# Altium PCB 模型主控V31.PcbDoc (part 2 of 2)
Units mil, origin at the board's own origin, x right, y up, seen from the top; angles counter-clockwise.
Board outline 1613.6 x 1060.03 mil, 4 copper layers (Top Layer, Mid-Layer 1, Mid-Layer 2, Bottom Layer); 72 components, 81 nets, 272 pads, 75 vias.
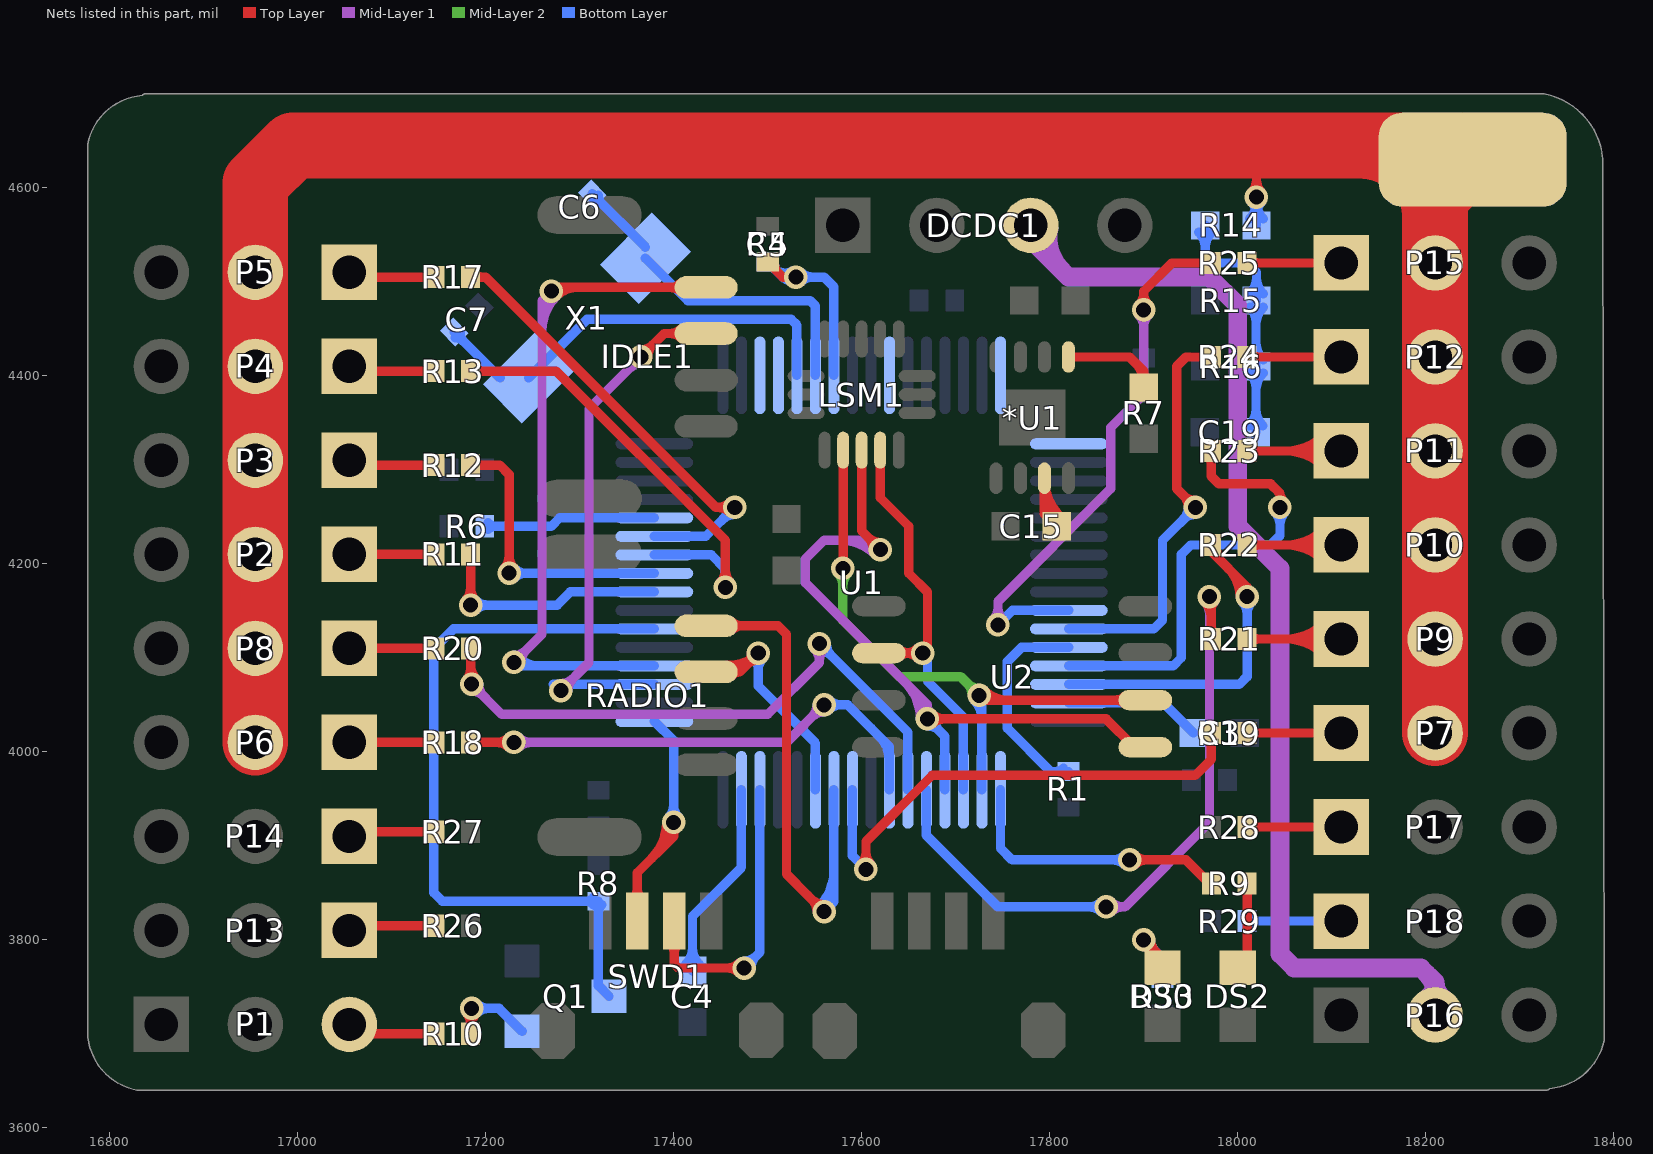
[diagram p4: the nets of this part, all layers, seen from the top]

## Via types
v1: diameter 25, hole 16, Top Layer to Bottom Layer, 75 vias

## Nets (pads, with @x,y where several pads share a name; then routed paths per layer and width w, separated by ;. In a path a pad name is that pad's centre, name@x,y a point inside that pad or via, vN(x,y) a via of type N, cw(c..) or ccw(c..) an arc to the next point about the centre after c; other vN are vias at no path point) (continued)
LED_R: R9.1 U1.33 | length 358.9
  Top Layer w10: v1(17885,3885) 17945,3885 17970,3860 R9.1@17972,3860 ; v1@17890.3,3879.7 cw(c17903.11,3866.89) 17903.11,3885 cw(c17903.11,3903.11) v1@17890.3,3890.3
  Bottom Layer w10: U1.33@17747.64,3959.53 17747.64,3897.36 17760,3885 v1(17885,3885) ; v1@17879.7,3879.7 ccw(c17866.89,3866.89) 17866.89,3885 ccw(c17866.89,3903.11) v1@17879.7,3890.3
Net*U1_1: *U1.1 R7.2 | length 154.2
  Top Layer w10: *U1.1@17820,4420 17885,4420 17900.06,4404.94 ; 17890.84,4414.16 cw(c17868.01,4391.34) R7.2@17900.06,4387.5 17900.06,4404.94 ; R7.2@17895.01,4396.13 ccw(c17889.86,4404.94) 17900.06,4404.94 ; R7.2@17905.11,4396.13 cw(c17910.26,4404.94) 17900.06,4404.94
Net*U1_7: *U1.7 C15.2 | length 138.5
  Top Layer w10: 17794.41,4268.89 ccw(c17832.96,4268.89) C15.2@17807.5,4239.94 17794.41,4253.03 *U1.7@17794.41,4291 ccw(c17852.41,4291) C15.2@17814.1,4247.44
NetC3_1: C3.1 U1.31 | length 145.8
  Bottom Layer w10: U1.31@17820.47,4052.05 17920.95,4052.05 C3.1@17953,4020
NetC4_1: C4.1 U1.47 | length 314.5
  Bottom Layer w10: C4.1@17412.93,3774.07 ccw(c17395.86,3791.14) 17420,3791.14 ccw(c17444.14,3791.14) C4.1@17427.07,3774.07 ; C4.1@17420,3767 17420,3825 17472.05,3877.05 U1.47@17472.05,3959.53 17472.05,3897.05
NetC5_2: C5.2 R4.1 U1.7 | length 303.6
  Top Layer w10: R4.1@17500,4521 17516,4505 v1(17530,4505) ; R4.1@17506.81,4521 ccw(c17523.25,4521) 17511.63,4509.37
  Bottom Layer w10: C5.2@17500,4521 17516,4505 v1(17530,4505) 17560,4505 17570.47,4494.53 U1.7@17570.47,4400.47 ; C5.2@17506.81,4521 ccw(c17523.25,4521) 17511.63,4509.37 ; C5.2@17507,4514 ccw(c17518.25,4525.25) v1@17526.24,4511.49 ; 17516.2,4504.8 ccw(c17525,4513.61) v1@17531.25,4502.84 ; v1@17535.3,4499.7 cw(c17548.11,4486.89) 17548.11,4505 cw(c17548.11,4523.11) v1@17535.3,4510.3
NetC6_2: C6.2 U1.6 X1.1 | length 374.5
  Bottom Layer w10: C6.2@17313.44,4593.44 X1.1@17370,4536.87 ; C6.2@17314.72,4587.15 cw(c17314.72,4575.08) 17323.25,4583.62 cw(c17331.79,4592.15) C6.2@17319.72,4592.15 ; X1.1@17370,4525 17415,4480 17545,4480 17550.79,4474.21 U1.6@17550.79,4400.47
NetC7_2: C7.2 U1.5 X1.2 | length 455.3
  Bottom Layer w10: C7.2@17166.56,4446.56 X1.2@17215.41,4397.72 ; C7.2@17167.85,4440.28 cw(c17167.85,4428.21) 17176.38,4436.75 cw(c17184.92,4445.28) C7.2@17172.85,4445.28 ; X1.2@17245.55,4397.72 17307.83,4460 17525,4460 17531.1,4453.9 U1.5@17531.1,4400.47
NetC19_1: C19.1 R14.1 R15.2 R16.2 | length 493.7
  Bottom Layer w10: R14.1@17958.43,4552.86 cw(c17941.36,4535.79) 17965.5,4535.79 cw(c17989.64,4535.79) R14.1@17972.57,4552.86 ; R14.1@17965.5,4559.94 17965.5,4524.5 17970,4520 18000,4520 18010,4520 18020,4510 R15.2@18020,4480 18019.5,4479.5 C19.1@18019.5,4339.94 ; C19.1@18012.43,4347.01 ccw(c17995.36,4364.08) 18019.5,4364.08 ccw(c18043.64,4364.08) C19.1@18026.57,4347.01 ; R16.2@18012.93,4402.93 cw(c17997.06,4387.06) 18019.5,4387.06 ; R16.2@18012.93,4417.07 ccw(c17997.06,4432.94) 18019.5,4432.94 ; R15.2@18012.93,4472.93 cw(c17997.06,4457.06) 18019.5,4457.06 ; R15.2@18012.93,4487.07 ccw(c17995.86,4504.14) 18020,4504.14 ccw(c18044.14,4504.14) R15.2@18027.07,4487.07 ; 18019.5,4384.65 cw(c18045.35,4384.65) R16.2@18027.07,4402.93 ; 18019.5,4435.35 ccw(c18045.35,4435.35) R16.2@18027.07,4417.07 ; 18019.5,4454.65 cw(c18045.35,4454.65) R15.2@18027.07,4472.93
NetDS2_1: DS2.1 R9.2 | length 112.8
  Top Layer w10: DS2.1@18000,3770.32 18010,3780.32 R9.2@18010,3860 ; R9.2@18006.46,3854.65 cw(c17997.93,3846.12) 18010,3846.12 cw(c18022.07,3846.12) R9.2@18013.54,3854.65
NetDS3_1: DS3.1 R30.2 | length 185.3
  Top Layer w10: v1@17900,3792.5 cw(c17900,3774.39) 17912.8,3787.2 cw(c17925.61,3800) v1@17907.5,3800 ; v1(17900,3800) 17920,3780 DS3.1@17920,3770.32 ; 17908.9,3791.1 cw(c17891.85,3774.05) DS3.1@17915.74,3770.77
  Bottom Layer w10: v1@17900,3792.5 cw(c17900,3774.39) 17912.8,3787.2 cw(c17925.61,3800) v1@17907.5,3800 ; v1(17900,3800) 17920,3780 R30.2@17920,3759 ; R30.2@17916.46,3762.54 ccw(c17907.93,3771.07) 17920,3771.07 ccw(c17932.07,3771.07) R30.2@17923.54,3762.54
NetP1_3: P1.3 R10.2 | length 100
  Top Layer w10: P1.3@17065,3700 R10.2@17146,3700 ; R10.2@17142.46,3696.46 ccw(c17133.93,3687.93) 17133.93,3700 ccw(c17133.93,3712.07) R10.2@17142.46,3703.54
NetP2_1: P2.1 R11.2 | length 110
  Top Layer w10: P2.1@17055,4210 R11.2@17146,4210 ; R11.2@17142.46,4206.46 ccw(c17133.93,4197.93) 17133.93,4210 ccw(c17133.93,4222.07) R11.2@17142.46,4213.54
NetP3_1: P3.1 R12.2 | length 105
  Top Layer w10: P3.1@17060,4305 R12.2@17146,4305 ; R12.2@17142.46,4301.46 ccw(c17133.93,4292.93) 17133.93,4305 ccw(c17133.93,4317.07) R12.2@17142.46,4308.54
NetP4_1: P4.1 R13.2 | length 112
  Top Layer w10: P4.1@17055,4410 17060,4405 R13.2@17146,4405 ; R13.2@17142.46,4401.46 ccw(c17133.93,4392.93) 17133.93,4405 ccw(c17133.93,4417.07) R13.2@17142.46,4408.54
NetP5_1: P5.1 R17.2 | length 112
  Top Layer w10: P5.1@17055,4510 17060,4505 R17.2@17146,4505 ; R17.2@17142.46,4501.46 ccw(c17133.93,4492.93) 17133.93,4505 ccw(c17133.93,4517.07) R17.2@17142.46,4508.54
NetP6_1: P6.1 R18.2 | length 110
  Top Layer w10: P6.1@17055,4010 R18.2@17146,4010 ; R18.2@17142.46,4006.46 ccw(c17133.93,3997.93) 17133.93,4010 ccw(c17133.93,4022.07) R18.2@17142.46,4013.54
NetP7_1: P7.1 R19.2 | length 119
  Top Layer w10: R19.2@18010,4020 P7.1@18110,4020 ; R19.2@18013.54,4016.46 cw(c18022.07,4007.93) 18022.07,4020 cw(c18022.07,4032.07) R19.2@18013.54,4023.54
NetP8_1: P8.1 R20.2 | length 110
  Top Layer w10: P8.1@17055,4110 R20.2@17146,4110 ; R20.2@17142.46,4106.46 ccw(c17133.93,4097.93) 17133.93,4110 ccw(c17133.93,4122.07) R20.2@17142.46,4113.54
NetP9_1: P9.1 R21.2 | length 267.1
  Top Layer w10: R21.2@18010,4120 P9.1@18110,4120 ; R21.2@18013.54,4116.46 cw(c18022.07,4107.93) 18022.07,4120 cw(c18022.07,4132.07) R21.2@18013.54,4123.54 ; P9.1@18092.66,4102.66 ccw(c18050.79,4060.79) 18050.79,4120 ccw(c18050.79,4179.21) P9.1@18092.66,4137.34 ; P9.1@18099.73,4109.73 ccw(c18074.93,4084.93) 18074.93,4120 ccw(c18074.93,4155.07) P9.1@18099.73,4130.27
NetP10_1: P10.1 R22.2 | length 267.1
  Top Layer w10: R22.2@18010,4220 P10.1@18110,4220 ; R22.2@18013.54,4216.46 cw(c18022.07,4207.93) 18022.07,4220 cw(c18022.07,4232.07) R22.2@18013.54,4223.54 ; P10.1@18092.66,4202.66 ccw(c18050.79,4160.79) 18050.79,4220 ccw(c18050.79,4279.21) P10.1@18092.66,4237.34 ; P10.1@18099.73,4209.73 ccw(c18074.93,4184.93) 18074.93,4220 ccw(c18074.93,4255.07) P10.1@18099.73,4230.27
NetP11_1: P11.1 R23.2 | length 267.1
  Top Layer w10: R23.2@18010,4320 P11.1@18110,4320 ; R23.2@18013.54,4316.46 cw(c18022.07,4307.93) 18022.07,4320 cw(c18022.07,4332.07) R23.2@18013.54,4323.54 ; P11.1@18092.66,4302.66 ccw(c18050.79,4260.79) 18050.79,4320 ccw(c18050.79,4379.21) P11.1@18092.66,4337.34 ; P11.1@18099.73,4309.73 ccw(c18074.93,4284.93) 18074.93,4320 ccw(c18074.93,4355.07) P11.1@18099.73,4330.27
NetP12_1: P12.1 R24.2 | length 119
  Top Layer w10: R24.2@18010,4420 P12.1@18110,4420 ; R24.2@18013.54,4416.46 cw(c18022.07,4407.93) 18022.07,4420 cw(c18022.07,4432.07) R24.2@18013.54,4423.54
NetP13_1: P13.1 R26.1 | length 105
  Top Layer w10: P13.1@17060,3815 R26.1@17146,3815 ; R26.1@17142.46,3811.46 ccw(c17133.93,3802.93) 17133.93,3815 ccw(c17133.93,3827.07) R26.1@17142.46,3818.54
NetP14_1: P14.1 R27.1 | length 105
  Top Layer w10: P14.1@17060,3915 R27.1@17146,3915 ; R27.1@17142.46,3911.46 ccw(c17133.93,3902.93) 17133.93,3915 ccw(c17133.93,3927.07) R27.1@17142.46,3918.54
NetP15_1: P15.1 R25.2 | length 119
  Top Layer w10: R25.2@18010,4520 P15.1@18110,4520 ; R25.2@18013.54,4516.46 cw(c18022.07,4507.93) 18022.07,4520 cw(c18022.07,4532.07) R25.2@18013.54,4523.54
NetP17_1: P17.1 R28.1 | length 119
  Top Layer w10: R28.1@18010,3920 P17.1@18110,3920 ; R28.1@18013.54,3916.46 cw(c18022.07,3907.93) 18022.07,3920 cw(c18022.07,3932.07) R28.1@18013.54,3923.54
NetP18_1: P18.1 R29.1 | length 119
  Bottom Layer w10: R29.1@18010,3820 P18.1@18110,3820 ; R29.1@18013.54,3816.46 cw(c18022.07,3807.93) 18022.07,3820 cw(c18022.07,3832.07) R29.1@18013.54,3823.54
NetQ1_2: Q1.2 R10.1 | length 165.7
  Top Layer w10: v1@17179.7,3721.7 cw(c17169.31,3711.31) R10.1@17184,3711.31 ; R10.1@17180.46,3705.35 ccw(c17171.93,3713.88) 17184,3713.88 ccw(c17196.07,3713.88) R10.1@17187.54,3705.35 ; R10.1@17184,3700 v1@17184,3726 ; R10.1@17184,3706.48 cw(c17205.52,3706.48) v1@17190.3,3721.7
  Bottom Layer w10: v1(17185,3727) 17214.34,3727 Q1.2@17238.74,3702.6 ; v1@17190.3,3721.7 cw(c17203.11,3708.89) 17203.11,3727 cw(c17203.11,3745.11) v1@17190.3,3732.3
NetR1_2: R1.2 U1.28 | length 245.8
  Bottom Layer w10: R1.2@17814.65,3975.46 ccw(c17806.12,3966.93) 17806.12,3979 ccw(c17806.12,3991.07) R1.2@17814.65,3982.54 ; R1.2@17820,3979 17801,3979 17755,4025 17755,4095 17755,4096.1 17770,4111.1 U1.28@17820.47,4111.1
NetR6_2: R6.2 U1.60 | length 203.2
  Bottom Layer w10: R6.2@17199,4240 17270,4240 17278.9,4248.9 U1.60@17379.53,4248.9 ; R6.2@17202.54,4236.46 cw(c17211.07,4227.93) 17211.07,4240 cw(c17211.07,4252.07) R6.2@17202.54,4243.54
NRF_CE: U1.10
POWER: DCDC1.3 P16.2 | length 1325.4
  Mid-Layer 1 w20: DCDC1.3@17780,4560 17780,4545 17820,4505 17970,4505 18000,4475 18000,4240 18045,4195 18045,3785 18060,3770 18195,3770 18210,3755 ; DCDC1.3@17799.16,4556.24 ccw(c17846.88,4546.89) 17812.5,4512.5 ; P16.2@18199.74,3736.62 ccw(c18188.4,3755) 18210,3755 ; 18200.09,3764.91 cw(c18169.28,3734.11) P16.2@18210.45,3719.85 ; P16.2@18210,3720 18210,3755 ; P16.2@18220.26,3736.62 cw(c18231.6,3755) 18210,3755
PWM1: R11.1 U1.56 | length 331.2
  Top Layer w10: v1@17178.7,4161.3 ccw(c17165.89,4174.11) 17184,4174.11 ccw(c17202.11,4174.11) v1@17189.3,4161.3 ; R11.1@17180.46,4204.65 cw(c17171.93,4196.12) 17184,4196.12 cw(c17196.07,4196.12) R11.1@17187.54,4204.65 ; v1(17184,4156) R11.1@17184,4210
  Bottom Layer w10: v1(17184,4156) 17276,4156 17290.16,4170.16 U1.56@17379.53,4170.16 ; v1@17189.3,4150.7 cw(c17202.11,4137.89) 17202.11,4156 cw(c17202.11,4174.11) v1@17189.3,4161.3
PWM2: R12.1 U1.57 | length 380.6
  Top Layer w10: R12.1@17184,4305 17215,4305 17225,4295 v1(17225,4190) ; R12.1@17187.54,4301.46 cw(c17196.07,4292.93) 17196.07,4305 cw(c17196.07,4317.07) R12.1@17187.54,4308.54 ; v1@17219.7,4195.3 ccw(c17206.89,4208.11) 17225,4208.11 ccw(c17243.11,4208.11) v1@17230.3,4195.3
  Bottom Layer w10: v1(17225,4190) 17379.37,4190 U1.57@17379.53,4189.84 ; v1@17230.3,4184.7 cw(c17243.11,4171.89) 17243.11,4190 cw(c17243.11,4208.11) v1@17230.3,4195.3
PWM3: R25.1 U1.26 | length 689.8
  Top Layer w10: v1@17894.7,4475.3 ccw(c17881.89,4488.11) 17900,4488.11 ccw(c17918.11,4488.11) v1@17905.3,4475.3 ; v1(17900,4470) 17900,4490 17930,4520 R25.1@17972,4520 ; R25.1@17968.46,4516.46 ccw(c17959.93,4507.93) 17959.93,4520 ccw(c17959.93,4532.07) R25.1@17968.46,4523.54
  Mid-Layer 1 w10: v1@17739.7,4140.3 ccw(c17726.89,4153.11) 17745,4153.11 ccw(c17763.11,4153.11) v1@17750.3,4140.3 ; v1(17745,4135) 17745,4160 17865,4280 17865,4345 17900,4380 v1(17900,4470) ; v1@17894.7,4464.7 cw(c17881.89,4451.89) 17900,4451.89 cw(c17918.11,4451.89) v1@17905.3,4464.7
  Bottom Layer w10: v1(17745,4135) 17760.47,4150.47 U1.26@17820.47,4150.47
PWM4: R24.1 U1.27 | length 513.1
  Top Layer w10: v1@17947.5,4260 ccw(c17929.39,4260) 17942.2,4272.8 ccw(c17955,4285.61) v1@17955,4267.5 ; v1(17955,4260) 17935,4280 17935,4410 17945,4420 R24.1@17972,4420 ; R24.1@17968.46,4416.46 ccw(c17959.93,4407.93) 17959.93,4420 ccw(c17959.93,4432.07) R24.1@17968.46,4423.54
  Bottom Layer w10: U1.27@17820.47,4130.79 17910.79,4130.79 17920,4140 17920,4225 v1(17955,4260) ; v1@17947.5,4260 cw(c17929.39,4260) 17942.2,4247.2 cw(c17955,4234.39) v1@17955,4252.5
PWM5: R13.1 U1.58 | length 544.2
  Top Layer w10: R13.1@17184,4405 17275,4405 17455,4225 v1(17455,4175) ; R13.1@17187.54,4401.46 cw(c17196.07,4392.93) 17196.07,4405 cw(c17196.07,4417.07) R13.1@17187.54,4408.54 ; v1@17449.7,4180.3 ccw(c17436.89,4193.11) 17455,4193.11 ccw(c17473.11,4193.11) v1@17460.3,4180.3
  Bottom Layer w10: U1.58@17379.53,4209.53 17440,4209.53 17454.53,4195 17454.53,4175.47 v1(17455,4175)
PWM6: R17.1 U1.59 | length 556.6
  Top Layer w10: R17.1@17184,4505 17200,4505 17445,4260 v1(17465,4260) ; R17.1@17187.54,4501.46 cw(c17196.07,4492.93) 17196.07,4505 cw(c17196.07,4517.07) R17.1@17187.54,4508.54 ; v1@17459.7,4254.7 ccw(c17446.89,4241.89) 17446.89,4260 ccw(c17446.89,4278.11) v1@17459.7,4265.3
  Bottom Layer w10: U1.59@17379.53,4229.21 17434.21,4229.21 v1(17465,4260) ; v1@17457.5,4260 cw(c17439.39,4260) 17452.2,4247.2 cw(c17465,4234.39) v1@17465,4252.5
PWM7: R23.1 U1.29 | length 567.1
  Top Layer w10: R23.1@17968.46,4314.65 cw(c17959.93,4306.12) 17972,4306.12 cw(c17984.07,4306.12) R23.1@17975.54,4314.65 ; R23.1@17972,4320 17972,4293 17980,4285 18035,4285 18045,4275 v1(18045,4260) ; 18041.31,4278.69 cw(c18025.75,4263.13) v1@18047.47,4259.6
  Bottom Layer w10: U1.29@17820.47,4091.42 17931.42,4091.42 17940,4100 17940,4210 17950,4220 18035,4220 18045,4230 v1(18045,4260) ; v1@18039.7,4254.7 cw(c18026.89,4241.89) 18045,4241.89 cw(c18063.11,4241.89) v1@18050.3,4254.7
PWM8: R22.1 U1.30 | length 443.9
  Top Layer w10: R22.1@17972,4220 17972,4213 18010,4175 v1(18010,4165) ; R22.1@17977,4218.19 ccw(c18001.6,4218.19) 17984.2,4200.8 ; 17990.13,4194.87 cw(c17960.25,4165) v1@18002.5,4165 ; 18007.2,4177.8 cw(c17994.39,4165) v1@18012.5,4165
  Bottom Layer w10: U1.30@17820.47,4071.73 18001.73,4071.73 18010,4080 18010,4115 v1(18010,4165) ; v1@18004.7,4159.7 cw(c17991.89,4146.89) 18010,4146.89 cw(c18028.11,4146.89) v1@18015.3,4159.7
PWM9: R19.1 U1.41 | length 599.7
  Top Layer w10: v1@17599.27,3880.3 ccw(c17586.47,3893.11) 17604.57,3893.11 ccw(c17622.68,3893.11) v1@17609.87,3880.3 ; v1@17605,3875.43 v1(17604.57,3875) 17604.57,3904.57 17675,3975 17955,3975 17972,3992 R19.1@17972,4020 ; R19.1@17968.46,4014.65 cw(c17959.93,4006.12) 17972,4006.12 cw(c17984.07,4006.12) R19.1@17975.54,4014.65
  Bottom Layer w10: U1.41@17590.16,3959.53 17590.16,3889.41 v1(17604.57,3875)
PWM10: R21.1 U1.37 | length 836.9
  Top Layer w10: v1@17964.7,4159.7 cw(c17947.06,4142.06) 17972,4142.06 ; R21.1@17968.46,4125.35 ccw(c17959.93,4133.88) 17972,4133.88 ccw(c17984.07,4133.88) R21.1@17975.54,4125.35 ; v1(17970,4165) 17972,4163 R21.1@17972,4120 ; 17972,4151.72 cw(c17983.28,4151.72) v1@17975.3,4159.7
  Mid-Layer 1 w10: v1(17860,3835) 17880,3835 17970,3925 v1(17970,4165) ; v1@17865.3,3829.7 cw(c17878.11,3816.89) 17878.11,3835 cw(c17878.11,3853.11) v1@17865.3,3840.3 ; v1@17964.7,4159.7 cw(c17951.89,4146.89) 17970,4146.89 cw(c17988.11,4146.89) v1@17975.3,4159.7
  Bottom Layer w10: U1.37@17668.9,3959.53 17668.9,3911.1 17745,3835 v1(17860,3835) ; v1@17854.7,3829.7 ccw(c17841.89,3816.89) 17841.89,3835 ccw(c17841.89,3853.11) v1@17854.7,3840.3
PWM11: R20.1 U1.38 | length 791.3
  Top Layer w10: v1@17179.7,4077.3 ccw(c17169.31,4087.69) 17184,4087.69 ; R20.1@17180.46,4104.65 cw(c17171.93,4096.12) 17184,4096.12 cw(c17196.07,4096.12) R20.1@17187.54,4104.65 ; v1@17184,4072 R20.1@17184,4110 ; 17184,4092.52 ccw(c17205.52,4092.52) v1@17190.3,4077.3
  Mid-Layer 1 w10: v1@17185,4064.5 cw(c17185,4046.39) 17197.8,4059.2 cw(c17210.61,4072) v1@17192.5,4072 ; v1(17185,4072) 17217,4040 17235,4040 17500,4040 17555,4095 v1(17555,4115) ; v1@17549.7,4109.7 cw(c17536.89,4096.89) 17555,4096.89 cw(c17573.11,4096.89) v1@17560.3,4109.7
  Bottom Layer w10: v1@17555,4107.5 cw(c17555,4089.39) 17567.8,4102.2 cw(c17580.61,4115) v1@17562.5,4115 ; v1(17555,4115) 17649.21,4020.79 U1.38@17649.21,3959.53
PWM12: R18.1 U1.39 | length 680.9
  Top Layer w10: R18.1@17184,4010 v1(17230,4010) ; R18.1@17187.54,4006.46 cw(c17196.07,3997.93) 17196.07,4010 cw(c17196.07,4022.07) R18.1@17187.54,4013.54 ; v1@17224.7,4004.7 ccw(c17211.89,3991.89) 17211.89,4010 ccw(c17211.89,4028.11) v1@17224.7,4015.3
  Mid-Layer 1 w10: v1(17230,4010) 17520,4010 v1(17560,4050) ; v1@17235.3,4004.7 cw(c17248.11,3991.89) 17248.11,4010 cw(c17248.11,4028.11) v1@17235.3,4015.3 ; v1@17552.5,4050 cw(c17534.39,4050) 17547.2,4037.2 cw(c17560,4024.39) v1@17560,4042.5
  Bottom Layer w10: v1(17560,4050) 17585,4050 17610,4025 17629.53,4005.47 U1.39@17629.53,3959.53 ; v1@17565.3,4044.7 cw(c17578.11,4031.89) 17578.11,4050 cw(c17578.11,4068.11) v1@17565.3,4055.3 ; 17620.55,4014.45 cw(c17601.06,3994.96) U1.39@17628.62,3994.96
SBUS: Q1.3 R8.1 U1.54 | length 825.5
  Bottom Layer w10: R8.1@17314.65,3837.46 ccw(c17306.12,3828.93) 17306.12,3841 ccw(c17306.12,3853.07) R8.1@17314.65,3844.54 ; R8.1@17316.46,3837.46 cw(c17307.93,3828.93) 17320,3828.93 cw(c17332.07,3828.93) R8.1@17323.54,3837.46 ; Q1.3@17331.26,3740 17320,3751.26 R8.1@17320,3841 17154,3841 17145,3850 17145,4110 17165.79,4130.79 U1.54@17379.53,4130.79
SCL_B: U1.3
SCLK_FC: SWD1.3 U1.49 | length 337.5
  Top Layer w10: SWD1.3@17356.44,3843.52 ccw(c17344.82,3855.14) 17361.26,3855.14 ccw(c17377.7,3855.14) SWD1.3@17366.08,3843.52 ; SWD1.3@17361.26,3840 17361.26,3871.26 17400,3910 v1(17400,3925) ; 17376.59,3886.59 ccw(c17338.18,3925) v1@17392.5,3925 ; 17393.66,3903.66 ccw(c17372.32,3925) v1@17402.5,3925
  Bottom Layer w10: U1.49@17379.53,4032.36 17400,4011.89 v1(17400,3925) ; v1@17394.7,3930.3 ccw(c17381.89,3943.11) 17400,3943.11 ccw(c17418.11,3943.11) v1@17405.3,3930.3
SDA_B: U1.4
SPI2_CK: LSM1.2 U1.34 U2.6 | length 763.8
  Top Layer w10: v1@17580.31,4195.31 LSM1.2@17580.31,4320.94 ; v1(17725,4060) 17730,4055 U2.6@17901.73,4055 ; v1@17730.3,4065.3 ccw(c17755.18,4090.18) 17755.18,4055 ; U2.6@17879.9,4050.88 ccw(c17869.95,4040.93) 17869.95,4055 ccw(c17869.95,4069.07) U2.6@17879.9,4059.12
  Mid-Layer 2 w10: v1@17574.7,4189.7 cw(c17561.89,4176.89) 17580,4176.89 cw(c17598.11,4176.89) v1@17585.3,4189.7 ; v1(17580,4195) 17580,4140 17640,4080 17705,4080 v1(17725,4060) ; v1@17717.5,4060 ccw(c17699.39,4060) 17712.2,4072.8 ccw(c17725,4085.61) v1@17725,4067.5
  Bottom Layer w10: v1@17719.7,4054.7 cw(c17699.76,4034.76) 17727.95,4034.76 ; U1.34@17727.95,3959.53 v1@17727.95,4057.05
SPI2_SI: LSM1.3 U1.36 U2.5 | length 972.6
  Top Layer w10: LSM1.3@17600,4320.94 17600,4235 v1(17620,4215) ; v1@17612.5,4215 ccw(c17594.39,4215) 17607.2,4227.8 ccw(c17620,4240.61) v1@17620,4222.5 ; v1(17670,4035) 17860,4035 17890,4005 U2.5@17901.73,4005 ; v1@17675.3,4029.7 cw(c17688.11,4016.89) 17688.11,4035 cw(c17688.11,4053.11) v1@17675.3,4040.3
  Mid-Layer 1 w10: 17577.75,4225 cw(c17577.75,4172.75) v1@17614.7,4209.7 ; 17601.89,4225 cw(c17601.89,4196.89) v1@17621.77,4216.77 ; v1(17620,4215) 17610,4225 17560,4225 17540,4205 17540,4180 17670,4050 v1(17670,4035) ; 17646.59,4073.41 cw(c17608.18,4035) v1@17662.5,4035 ; 17663.66,4056.34 cw(c17642.32,4035) v1@17672.5,4035
  Bottom Layer w10: v1@17670,4027.5 cw(c17670,4009.39) 17682.8,4022.2 cw(c17695.61,4035) v1@17677.5,4035 ; v1(17670,4035) 17688.58,4016.42 U1.36@17688.58,3959.53
SPI2_SO: LSM1.4 U1.35 U2.2 | length 490.4
  Top Layer w10: U2.2@17618.27,4105 v1(17665,4105) ; LSM1.4@17619.69,4320.94 17619.69,4270.31 17650,4240 17650,4190 17670,4170 v1@17670,4105 ; U2.2@17640.1,4100.88 cw(c17650.05,4090.93) 17650.05,4105 cw(c17650.05,4119.07) U2.2@17640.1,4109.12 ; v1@17659.7,4099.7 ccw(c17646.89,4086.89) 17646.89,4105 ccw(c17646.89,4123.11) v1@17659.7,4110.3
  Bottom Layer w10: v1@17670,4100 17670,4075 17708.27,4036.73 U1.35@17708.27,3959.53
SWD_FC: SWD1.2 U1.46 | length 421
  Top Layer w10: SWD1.2@17395.81,3796.48 cw(c17384.19,3784.86) 17400.63,3784.86 cw(c17417.07,3784.86) SWD1.2@17405.45,3796.48 ; SWD1.2@17400.63,3840 17400.63,3774.37 17405,3770 v1(17475,3770) ; v1@17469.7,3764.7 ccw(c17456.89,3751.89) 17456.89,3770 ccw(c17456.89,3788.11) v1@17469.7,3775.3
  Bottom Layer w10: v1(17475,3770) 17491.73,3786.73 U1.46@17491.73,3959.53 ; v1@17475,3777.5 ccw(c17475,3795.61) 17487.8,3782.8 ccw(c17500.61,3770) v1@17482.5,3770
UART1_R_1: RADIO1.3 U1.43 | length 367.6
  Top Layer w10: RADIO1.3@17434.57,4085 17470,4085 ; RADIO1.3@17455.93,4082 ccw(c17457.05,4105.95) 17474,4089 ; RADIO1.3@17456.39,4091.99 ccw(c17458.48,4136.52) v1(17490,4105) 17470,4085 ; RADIO1.3@17461.68,4080.82 cw(c17470,4074.63) 17470,4085 ; RADIO1.3@17461.68,4089.18 ccw(c17470,4095.37) 17470,4085 ; v1@17482.5,4105 cw(c17464.39,4105) 17477.2,4092.2 cw(c17490,4079.39) v1@17490,4097.5
  Bottom Layer w10: v1@17484.7,4099.7 cw(c17471.89,4086.89) 17490,4086.89 cw(c17508.11,4086.89) v1@17495.3,4099.7 ; v1(17490,4105) 17490,4070 17550.79,4009.21 U1.43@17550.79,3959.53
UART1_T_1: RADIO1.4 U1.42 | length 655.2
  Top Layer w10: RADIO1.4@17434.57,4134 17511,4134 17520,4125 17520,3920 17520,3870 17542.5,3847.5 v1(17560,3830) ; RADIO1.4@17461.02,4129.05 cw(c17472.97,4117.1) 17472.97,4134 cw(c17472.97,4150.9) RADIO1.4@17461.02,4138.95 ; v1@17552.5,3830 ccw(c17534.39,3830) 17547.2,3842.8 ccw(c17560,3855.61) v1@17560,3837.5
  Bottom Layer w10: v1@17554.7,3835.3 ccw(c17516.61,3873.39) 17570.47,3873.39 ; v1(17560,3830) 17570.47,3840.47 17570.47,3875 U1.42@17570.47,3959.53 ; v1@17561.77,3828.23 ccw(c17540.75,3849.25) 17570.47,3849.25
UART2_R_1: U1.17
UART2_T_1: U1.16
UART4_R_1: IDLE1.4 U1.52 | length 870.8
  Top Layer w10: v1@17274,4494 IDLE1.4@17434.57,4494 ; v1@17275.3,4484.7 cw(c17297.76,4462.24) 17297.76,4494 ; IDLE1.4@17408.12,4489.05 ccw(c17396.17,4477.1) 17396.17,4494 ccw(c17396.17,4510.9) IDLE1.4@17408.12,4498.95
  Mid-Layer 1 w10: v1(17230,4095) 17260,4125 17260,4480 ; v1@17230,4102.5 ccw(c17230,4120.61) 17242.8,4107.8 ccw(c17255.61,4095) v1@17237.5,4095 ; 17260,4447.75 cw(c17312.25,4447.75) v1@17275.3,4484.7 ; 17260,4471.89 cw(c17288.11,4471.89) v1@17268.23,4491.77
  Bottom Layer w10: v1@17233.58,4091.42 U1.52@17379.53,4091.42 ; v1@17235.3,4100.3 ccw(c17256.76,4121.76) 17256.76,4091.42
  other v1: 17270,4490
UART4_T_1: IDLE1.3 U1.51 | length 689.8
  Top Layer w10: v1(17365,4420) 17390,4445 IDLE1.3@17434.57,4445 ; v1@17365,4427.5 ccw(c17365,4445.61) 17377.8,4432.8 ccw(c17390.61,4420) v1@17372.5,4420 ; IDLE1.3@17408.12,4440.05 ccw(c17396.17,4428.1) 17396.17,4445 ccw(c17396.17,4461.9) IDLE1.3@17408.12,4449.95
  Mid-Layer 1 w10: v1(17280,4065) 17310,4095 17310,4365 v1(17365,4420) ; v1@17280,4072.5 ccw(c17280,4090.61) 17292.8,4077.8 ccw(c17305.61,4065) v1@17287.5,4065 ; v1@17357.5,4420 cw(c17339.39,4420) 17352.2,4407.2 cw(c17365,4394.39) v1@17365,4412.5
  Bottom Layer w10: v1@17271.73,4071.73 U1.51@17379.53,4071.73
VCC_DJ: P2.2 P3.2 P4.2 P5.2 P6.2 P7.2 P8.2 P9.2 P10.2 P11.2 P12.2 P15.2 pad.0@18250,4630 R14.2 | length 3386.8
  Top Layer w10: v1@18014.7,4595.3 ccw(c18001.89,4608.11) 18020,4608.11 ccw(c18038.11,4608.11) v1@18025.3,4595.3 ; v1(18020,4590) 18020,4635
  Top Layer w40: pad.0@18178.79,4608.79 cw(c18103.43,4533.43) P15.2@18210,4533.43 ; P9.2@18210,4120 P10.2@18210,4220 P11.2@18210,4320 P12.2@18210,4420 P15.2@18210,4520 pad.0@18210,4590
  Top Layer w70: P6.2@16955,4010 P8.2@16955,4110 P2.2@16955,4210 P3.2@16955,4310 P4.2@16955,4410 P5.2@16955,4510 16955,4605 16995,4645 18235,4645 pad.0@18250,4630 18210,4590 P15.2@18210,4520 P12.2@18210,4420 P11.2@18210,4320 P10.2@18210,4220 P9.2@18210,4120 P7.2@18210,4020 ; 18127.57,4645 cw(c18127.57,4557.57) 18189.39,4619.39 cw(c18139.64,4569.64) 18210,4569.64
  Bottom Layer w10: R14.2@18012.93,4567.07 ccw(c17995.86,4584.14) 18020,4584.14 ccw(c18044.14,4584.14) R14.2@18027.07,4567.07 ; v1@18014.7,4584.7 cw(c18001.89,4571.89) 18020,4571.89 cw(c18038.11,4571.89) v1@18025.3,4584.7 ; R14.2@18020,4560 v1(18020,4590)
pads on no net: DCDC1.4 IDLE1.GND LSM1.6 LSM1.7 LSM1.14 RADIO1.GND SWD1.1. SWD1.A U1.11 U1.14 USB_L.1. USB_L.A

## Polygon pours and split planes (outlines as drawn)
GND on Top Layer "Top Layer-No Net" (solid, remove dead copper, pour order 1000): 18392.8,4592.14 18372.8,4572.14 16727.8,4572.14 16727.8,3612.14 16657.8,3542.14 16667.8,3552.14 18547.8,3552.14
GND on Bottom Layer "Top Layer-No Net" (solid, remove dead copper, pour order 1001): 16779.02,4709.16 16779.02,3589.16 16799.02,3569.16 16819.02,3589.16 18559.02,3589.16 18559.02,4979.16 18554.02,4984.16

## Keep-outs
Keep-Out Layer:
  lines w10: 16838.44,4693.45 ccw(c16840.05,4633.93) 16781.55,4645 16781.55,3701.89 ccw(c16841.07,3703.5) 16830,3645 18328.11,3645 ; 16838.44,4695 18325,4695 cw(c18311.61,4624.23) 18383.38,4630.3 ; 18328.11,3646.55 ccw(c18326.5,3706.07) 18385,3695 ; 18383.36,4630.3 18385.12,3695

## Silkscreen, mask and mechanical layers (free items; w line width, h text height)
Top Overlay:
  text "MOCO_CONTROLLERV1.3.1" at 16825,4635 h60
  text "5V - +" at 17610,4635 h60
  text "BAT+" at 18000,4635 h60
  text "G+S" at 16900,4585 h60
  text "S+G" at 18040,4580 h60
  text "+-TR" at 17340,4340 h60 r90
  text "+-RT" at 17340,4020 h60 r90
  text "-CD+" at 17115,3840 h60